# EAGLE board dl010203di02 (EAGLE 7.5.0)
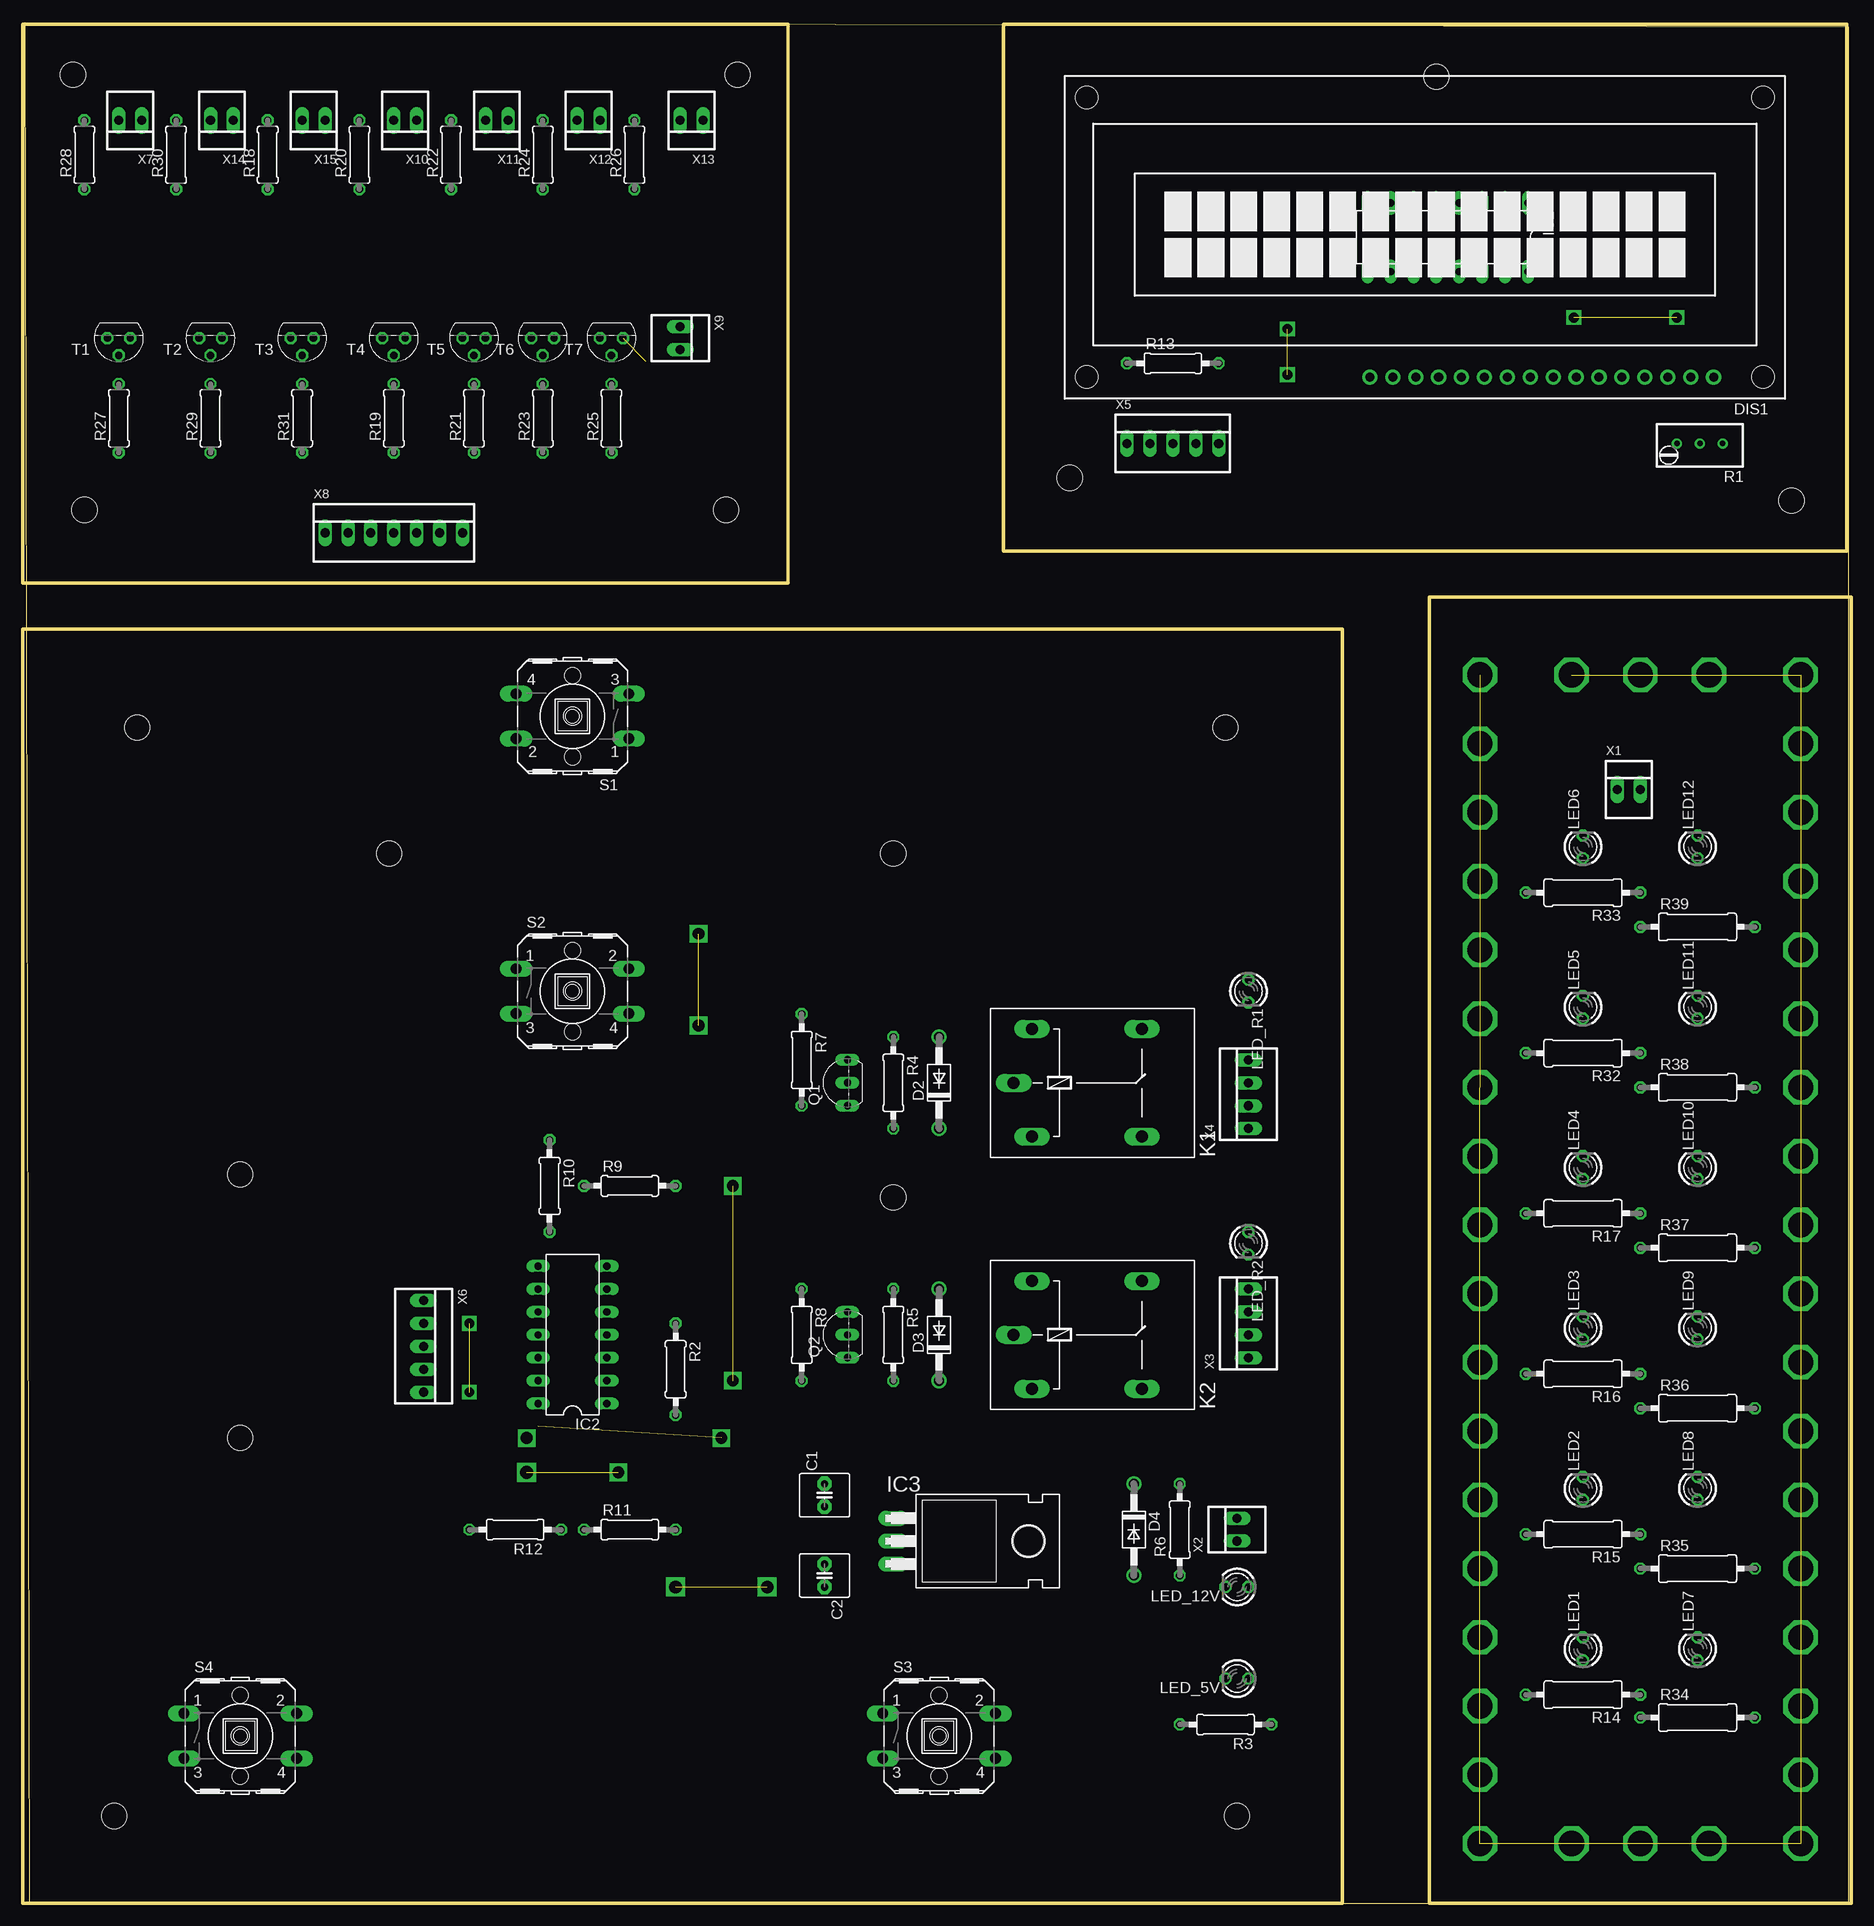
[diagram p0: board, top side]
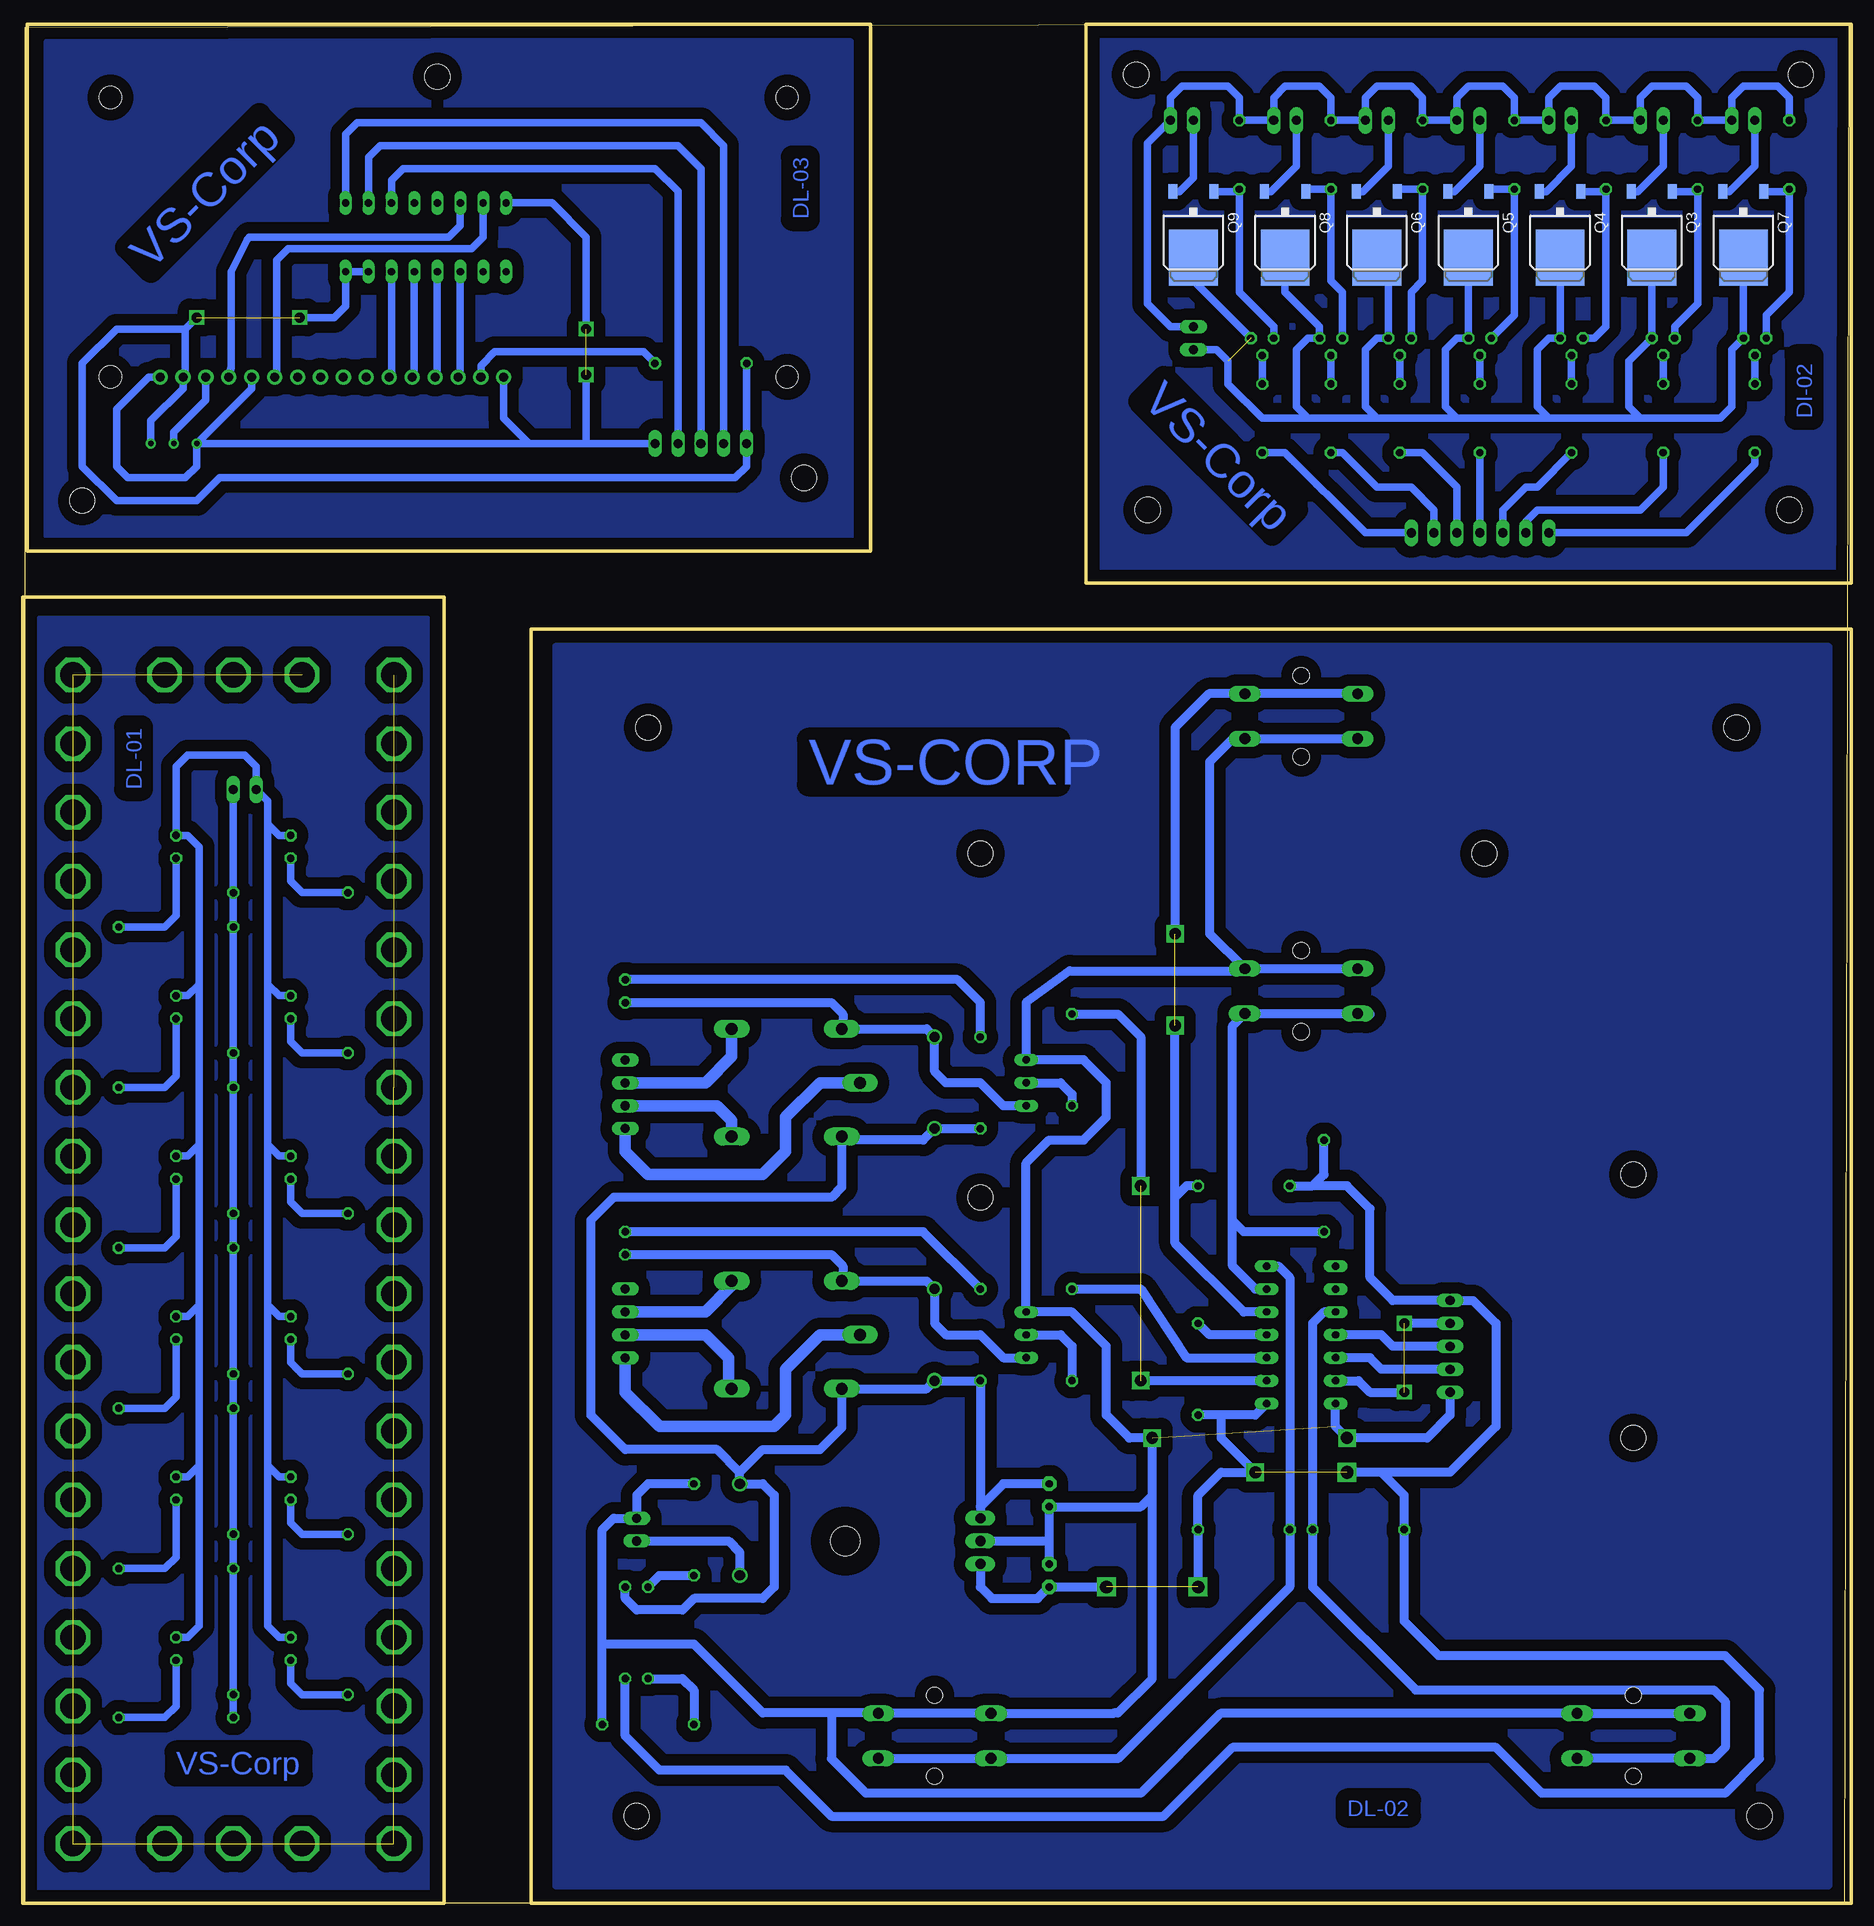
[diagram p1: board, bottom side, seen from below]

Size 202.69 x 208.46 mm. Coordinates in mm from the lower left corner, seen from the top.
Outline: 0.76,0 202.42,0
Outline: 202.42,0 202.42,207.95 0.25,208.46 0.76,0
Outline: 202.42,0 202.69,0 202.69,144.78 155.96,144.78 155.96,0 202.42,0
Outline: 0.76,0 146.3,0 146.3,141.22 0,141.22 0,0 0.76,0
Outline: 84.84,208.28 84.84,146.3 0,146.3 0,208.28 84.84,208.28
Outline: 108.71,208.28 202.18,208.28 202.18,149.86 108.71,149.86 108.71,208.28
Copper layers (1*16): Top 0.035mm / dielectric 1.5mm / Bottom 0.035mm
Design rules "default": minimum track width 10mil, minimum drill 24mil, track to track 8mil, track to pad 8mil, pad to pad 8mil, via to via 8mil, smd to smd 8mil, copper to edge 40mil, drill to drill 8mil, minimum pad ring 10mil, minimum via ring 8mil, stop-mask expansion 4mil, vias tented up to drill 0mil, thermal gap 10mil
Holes 2.8 mm at 10.16,9.65 134.62,9.65 12.7,130.3 133.35,130.3 96.52,116.33 40.64,116.33 24.13,80.77 96.52,78.23 24.13,51.56 6.86,154.43 77.98,154.43 79.25,202.69 5.59,202.69 116.08,157.99 156.72,202.44 196.09,155.45

## Footprints (pad centres in the part's own frame; a part is rotated, then mirrored left to right if it is on the bottom)
C2.5-6 = drill 0.813 pad 1.6 octagon: 1 -1.27,0; 2 1.27,0
DO41-10 = drill 1.118: A 5.08,0; C -5.08,0
TUXGR_16X2_R2 = drill 1 pad 1.676: 1 -32,15.5; 2 -29.46,15.5; 3 -26.92,15.5; 4 -24.38,15.5; 5 -21.84,15.5; 6 -19.3,15.5; 7 -16.76,15.5; 8 -14.22,15.5; 9 -11.68,15.5; 10 -9.14,15.5; 11 -6.6,15.5; 12 -4.06,15.5; 13 -1.52,15.5; 14 1.02,15.5; 15 3.56,15.5; 16 6.1,15.5 | hole 2.5: -37.5,-15.5; 37.5,-15.5; -37.5,15.5; 37.5,15.5
DIL16 = drill 0.813 long: 1 -8.89,-3.81; 2 -6.35,-3.81; 3 -3.81,-3.81; 4 -1.27,-3.81; 5 1.27,-3.81; 6 3.81,-3.81; 7 6.35,-3.81; 8 8.89,-3.81; 9 8.89,3.81; 10 6.35,3.81; 11 3.81,3.81; 12 1.27,3.81; 13 -1.27,3.81; 14 -3.81,3.81; 15 -6.35,3.81; 16 -8.89,3.81
DIL14 = drill 0.813 long: 1 -7.62,-3.81; 2 -5.08,-3.81; 3 -2.54,-3.81; 4 0,-3.81; 5 2.54,-3.81; 6 5.08,-3.81; 7 7.62,-3.81; 8 7.62,3.81; 9 5.08,3.81; 10 2.54,3.81; 11 0,3.81; 12 -2.54,3.81; 13 -5.08,3.81; 14 -7.62,3.81
TO220H = drill 1.118 long: 1 -2.54,-10.16; 2 0,-10.16; 3 2.54,-10.16 | hole 3.302: 0,4.826
G5LE = drill 1.321 long: 1 -7.493,-5.969; 2 -7.493,5.969; O 4.699,5.969; P -9.525,0; S 4.699,-5.969
LED3MM = drill 0.813 octagon: A -1.27,0; K 1.27,0
TO92-EBC = drill 0.813 long: B 0,-1.27; C -2.54,-1.27; E 2.54,-1.27
D-PAK_TO252AA = smd 1 x 1.6: 1 -2.28,-4.8; 3 2.28,-4.8 | smd 5.4 x 6.2: 4 0,2.5
RTRIMT93YA = drill 0.61: 1 0,-2.54; 2 0,0; 3 0,2.54
0207/10 = drill 0.813 octagon: 1 -5.08,0; 2 5.08,0
0309/12 = drill 0.813 octagon: 1 -6.35,0; 2 6.35,0
0207/7 = drill 0.813 octagon: 1 -3.81,0; 2 3.81,0
B3F-40XX = drill 1.194 long: 1 -6.248,2.489; 2 6.248,2.489; 3 -6.248,-2.489; 4 6.248,-2.489 | hole 1.803: 0,-4.496; 0,4.496
TO92 = drill 0.813 octagon: 1 1.27,0; 2 0,1.905; 3 -1.27,0
22-23-2021 = drill 1 long: 1 -1.27,0; 2 1.27,0
22-23-2041 = drill 1 long: 1 -3.81,0; 2 -1.27,0; 3 1.27,0; 4 3.81,0
22-23-2051 = drill 1 long: 1 -5.08,0; 2 -2.54,0; 3 0,0; 4 2.54,0; 5 5.08,0
22-23-2071 = drill 1 long: 1 -7.62,0; 2 -5.08,0; 3 -2.54,0; 4 0,0; 5 2.54,0; 6 5.08,0; 7 7.62,0

## Placement (x,y rotation side)
C1  [C2.5-6]  88.9,45.21 90 top
C2  [C2.5-6]  88.9,36.32 270 top
D2  1N4004  [DO41-10]  101.6,90.93 90 top
D3  1N4004  [DO41-10]  101.6,62.99 90 top
D4  1N4004  [DO41-10]  123.19,41.4 270 top
DIS1  TUXGR_16X2_R2  [TUXGR_16X2_R2]  155.45,184.66 180 top
IC1  4094N  [DIL16]  157.99,184.66 180 top
IC2  PIC16F676P  [DIL14]  60.96,62.99 90 top
IC3  7805T  [TO220H]  106.68,40.13 270 top
K1  G5L  [G5LE]  119.38,90.93 0 top
K2  G5L  [G5LE]  119.38,62.99 0 top
LED1  [LED3MM]  172.97,28.19 90 top
LED2  [LED3MM]  172.97,45.97 90 top
LED3  [LED3MM]  172.97,63.75 90 top
LED4  [LED3MM]  172.97,81.53 90 top
LED5  [LED3MM]  172.97,99.31 90 top
LED6  [LED3MM]  172.97,117.09 90 top
LED7  [LED3MM]  185.67,28.19 90 top
LED8  [LED3MM]  185.67,45.97 90 top
LED9  [LED3MM]  185.67,63.75 90 top
LED10  [LED3MM]  185.67,81.53 90 top
LED11  [LED3MM]  185.67,99.31 90 top
LED12  [LED3MM]  185.67,117.09 90 top
LED_5V  [LED3MM]  134.62,24.89 180 top
LED_12V  [LED3MM]  134.62,35.05 180 top
LED_R1  [LED3MM]  135.89,101.09 270 top
LED_R2  [LED3MM]  135.89,73.15 270 top
Q1  BC548  [TO92-EBC]  90.17,90.93 90 top
Q2  BC548  [TO92-EBC]  90.17,62.99 90 top
Q3  IRFR5305  [D-PAK_TO252AA]  22.1,184.91 180 bottom
Q4  IRFR5305  [D-PAK_TO252AA]  32.26,184.91 180 bottom
Q5  IRFR5305  [D-PAK_TO252AA]  42.42,184.91 180 bottom
Q6  IRFR5305  [D-PAK_TO252AA]  52.58,184.91 180 bottom
Q7  IRFR5305  [D-PAK_TO252AA]  11.94,184.91 180 bottom
Q8  IRFR5305  [D-PAK_TO252AA]  62.74,184.91 180 bottom
Q9  IRFR5305  [D-PAK_TO252AA]  72.9,184.91 180 bottom
R1  [RTRIMT93YA]  185.93,161.8 90 top
R2  [0207/10]  72.39,59.18 270 top
R3  [0207/10]  133.35,19.81 180 top
R4  [0207/10]  96.52,90.93 270 top
R5  [0207/10]  96.52,62.99 270 top
R6  [0207/10]  128.27,41.4 90 top
R7  [0207/10]  86.36,93.47 270 top
R8  [0207/10]  86.36,62.99 270 top
R9  [0207/10]  67.31,79.5 0 top
R10  [0207/10]  58.42,79.5 270 top
R11  [0207/10]  67.31,41.4 0 top
R12  [0207/10]  54.61,41.4 180 top
R13  [0207/10]  127.51,170.69 0 top
R14  [0309/12]  172.97,23.11 180 top
R15  [0309/12]  172.97,40.89 180 top
R16  [0309/12]  172.97,58.67 180 top
R17  [0309/12]  172.97,76.45 180 top
R18  10k  [0207/7]  27.18,193.8 90 top
R19  1k  [0207/7]  41.15,164.59 90 top
R20  10k  [0207/7]  37.34,193.8 90 top
R21  1k  [0207/7]  50.04,164.59 90 top
R22  10k  [0207/7]  47.5,193.8 90 top
R23  1k  [0207/7]  57.66,164.59 90 top
R24  10k  [0207/7]  57.66,193.8 90 top
R25  1k  [0207/7]  65.28,164.59 90 top
R26  10k  [0207/7]  67.82,193.8 90 top
R27  1k  [0207/7]  10.67,164.59 90 top
R28  10k  [0207/7]  6.86,193.8 90 top
R29  1k  [0207/7]  20.83,164.59 90 top
R30  10k  [0207/7]  17.02,193.8 90 top
R31  1k  [0207/7]  30.99,164.59 90 top
R32  [0309/12]  172.97,94.23 180 top
R33  [0309/12]  172.97,112.01 180 top
R34  [0309/12]  185.67,20.57 0 top
R35  [0309/12]  185.67,37.08 0 top
R36  [0309/12]  185.67,54.86 0 top
R37  [0309/12]  185.67,72.64 0 top
R38  [0309/12]  185.67,90.42 0 top
R39  [0309/12]  185.67,108.2 0 top
S1  [B3F-40XX]  60.96,131.57 180 top
S2  [B3F-40XX]  60.96,101.09 0 top
S3  [B3F-40XX]  101.6,18.54 0 top
S4  [B3F-40XX]  24.13,18.54 0 top
T1  2N3904  [TO92]  10.67,173.48 180 top
T2  2N3904  [TO92]  20.83,173.48 180 top
T3  2N3904  [TO92]  30.99,173.48 180 top
T4  2N3904  [TO92]  41.15,173.48 180 top
T5  2N3904  [TO92]  50.04,173.48 180 top
T6  2N3904  [TO92]  57.66,173.48 180 top
T7  2N3904  [TO92]  65.28,173.48 180 top
X1  22-23-2021  [22-23-2021]  178.05,123.44 0 top
X2  22-23-2021  [22-23-2021]  134.62,41.4 90 top
X3  22-23-2041  [22-23-2041]  135.89,64.26 90 top
X4  22-23-2041  [22-23-2041]  135.89,89.66 90 top
X5  22-23-2051  [22-23-2051]  127.51,161.8 0 top
X6  22-23-2051  [22-23-2051]  44.45,61.72 270 top
X7  22-23-2021  [22-23-2021]  11.94,197.61 180 top
X8  7 pin connector  [22-23-2071]  41.15,151.89 0 top
X9  22-23-2021  [22-23-2021]  72.9,173.48 270 top
X10  22-23-2021  [22-23-2021]  42.42,197.61 180 top
X11  22-23-2021  [22-23-2021]  52.58,197.61 180 top
X12  22-23-2021  [22-23-2021]  62.74,197.61 180 top
X13  22-23-2021  [22-23-2021]  74.17,197.61 180 top
X14  22-23-2021  [22-23-2021]  22.1,197.61 180 top
X15  22-23-2021  [22-23-2021]  32.26,197.61 180 top

## Library data of the parts
C1 C2 = capacitor-wima
D2-D4 = diode
DIS1 = display-lcd; OC_FARNELL: unknown; OC_NEWARK: unknown
IC1 = 40xx
IC2 = microchip; MF: MICROCHIP; MPN: PIC16F676-I/P; OC_FARNELL: 9760512; OC_NEWARK: 54K2829
IC3 = linear
K1 K2 = relay; OC_FARNELL: unknown; OC_NEWARK: unknown
LED1-LED12 LED_5V LED_12V LED_R1 LED_R2 = led
Q1 Q2 = transistor-npn
Q3-Q9 = transistor-power
R1 R18-R31 = rcl
R2-R17 R32-R39 = resistor
S1-S4 = switch-omron; MF: OMRON COMPONENTS USA; MPN: B3F-4000; OC_FARNELL: 176434; OC_NEWARK: 36K3105
T1-T7 = transistor
X1 X2 X7 X9-X15 = con-molex; MF: MOLEX; MPN: 22-23-2021; OC_FARNELL: 1462926; OC_NEWARK: 25C3832
X3 X4 = con-molex; MF: MOLEX; MPN: 22-23-2041; OC_FARNELL: 1462920; OC_NEWARK: 38C0355
X5 X6 = con-molex; MF: MOLEX; MPN: 22-23-2051; OC_FARNELL: 1462952; OC_NEWARK: 38C9178
X8 = con-molex; MF: MOLEX; MPN: 22-23-2071; OC_FARNELL: 1654534; OC_NEWARK: 56H0445

## Nets
E: DIS1.6 IC1.7
GND: C1.1 C2.1 IC2.14 IC3.2 Q1.E Q2.E R3.1 R6.2 S1.1 S1.2 S2.1 S2.2 S3.1 S3.2 S4.1 S4.2 X2.2 X6.5
GND1: Q3.4 Q4.4 Q5.4 Q6.4 Q7.4 Q8.4 Q9.4 T1.3 T2.3 T3.3 T4.3 T5.3 T6.3 T7.3 X9.2
N$1: DIS1.3 R1.2
N$2: DIS1.11 IC1.14
N$3: DIS1.12 IC1.13
N$4: DIS1.13 IC1.12
N$5: DIS1.14 IC1.11
N$6: IC2.11 X6.3
N$7: IC2.13 X6.2
N$8: IC2.12 X6.4
N$9: IC2.4 R2.1
N$10: Q1.B R7.2
N$11: D2.A K1.2 LED_R1.K Q1.C
N$12: D3.A K2.2 LED_R2.K Q2.C
N$13: Q2.B R8.2
N$15: K2.P X3.1
N$16: K2.S X3.2
N$17: K2.O X3.3
N$18: K1.S X4.2
N$19: K1.P X4.1
N$20: K1.O X4.3
N$21: D4.A X2.1
N$22: LED_5V.K R3.2
N$23: LED_R2.A R5.1
N$25: IC2.6 R10.2 S2.3 S2.4
N$26: LED_R1.A R4.1
N$27: IC2.7 R11.1 S3.3 S3.4
N$28: IC2.10 R12.1 S4.3 S4.4
N$29: R14.1 R15.1 R16.1 R17.1 R32.1 R33.1 R34.1 R35.1 R36.1 R37.1 R38.1 R39.1 X1.2
N$30: LED_12V.K R6.1
N$31: IC1.3 X5.4
N$32: IC1.2 X5.3
N$33: IC1.1 X5.2
N$34: IC2.5 R9.2 S1.3 S1.4
N$35: DIS1.15 R13.2
N$36: LED1.K LED2.K LED3.K LED4.K LED5.K LED6.K LED7.K LED8.K LED9.K LED10.K LED11.K LED12.K X1.1
N$37: C1.2 D2.C D3.C D4.C IC3.1 K1.1 K2.1 LED_12V.A R4.2 R5.2
N$40: LED1.A R14.2
N$41: LED2.A R15.2
N$42: LED3.A R16.2
N$43: LED4.A R17.2
N$44: LED5.A R32.2
N$45: LED6.A R33.2
N$46: LED7.A R34.2
N$47: LED8.A R35.2
N$48: LED9.A R36.2
N$49: LED10.A R37.2
N$50: LED11.A R38.2
N$51: LED12.A R39.2
N$93: Q7.1 R28.1 T1.1
N$94: R27.2 T1.2
N$95: Q7.3 X7.2
N$96: R27.1 X8.1
N$97: Q3.1 R30.1 T2.1
N$98: R29.2 T2.2
N$99: Q3.3 X14.2
N$100: Q4.1 R18.1 T3.1
N$101: R31.2 T3.2
N$102: Q4.3 X15.2
N$103: R31.1 X8.3
N$104: Q5.1 R20.1 T4.1
N$105: R19.2 T4.2
N$106: Q5.3 X10.2
N$107: R19.1 X8.4
N$108: Q6.1 R22.1 T5.1
N$109: R21.2 T5.2
N$110: Q6.3 X11.2
N$111: R21.1 X8.5
N$112: Q8.1 R24.1 T6.1
N$113: R23.2 T6.2
N$114: Q8.3 X12.2
N$115: R23.1 X8.6
N$116: Q9.1 R26.1 T7.1
N$117: R25.2 T7.2
N$118: Q9.3 X13.2
N$119: R25.1 X8.7
N$120: R29.1 X8.2
RELAY1: IC2.2 R7.1
RELAY2: IC2.3 R8.1
RS: DIS1.4 IC1.6
VCC: C2.2 IC2.1 IC3.3 LED_5V.A R2.2 R9.1 R10.1 R11.2 R12.2 X6.1
VDD: DIS1.2 IC1.15 IC1.16 R1.1 R13.1 X5.1
VDD1: R18.2 R20.2 R22.2 R24.2 R26.2 R28.2 R30.2 X7.1 X9.1 X10.1 X11.1 X12.1 X13.1 X14.1 X15.1
VSS: DIS1.1 DIS1.5 DIS1.16 IC1.8 R1.3 X5.5

## Tracks (layer width: path | path; a pad name or v marks a point on that pad's centre or on a via)
E
  Bottom 0.813: IC1.7 151.64,184.66 152.91,183.39 173.23,183.39 174.5,182.12 174.5,169.41 DIS1.6
GND  (via drill 1.3)  (1 unrouted)
  Bottom 1.016: X6.5 44.45,54.1 46.99,51.56 v55.88,51.56 57.15,52.83 IC2.14 | R3.1 138.43,28.7 | 138.43,28.7 138.43,41.4 137.16,42.67 X2.2 134.62,45.21 133.35,46.48 R6.2 | 77.47,45.21 77.47,24.89 81.28,21.08 81.74,21.08 81.79,21.03 S3.1 95.4,21.08 107.9,21.08 | 77.47,45.21 v77.47,51.56 80.01,51.56 82.55,54.1 82.55,61.72 86.36,65.53 Q2.E 91.44,82.04 88.9,84.58 85.09,84.58 82.55,87.12 82.55,90.93 85.09,93.47 Q1.E 91.44,99.82 86.64,103.35 67.44,103.35 S2.2 | S1.2 S1.1 68.53,129.08 71.12,126.49 71.12,107.44 71.07,107.44 S2.2 | S2.2 S2.1 | 107.9,21.08 S3.2 | 113.03,21.08 113.03,16 109.22,12.19 78.74,12.19 69.9,21.03 S4.2 S4.1 | 107.9,21.08 113.03,21.08 | 88.9,40.13 C1.1 78.74,43.94 77.47,45.21 | 88.9,40.13 C2.1 | IC3.2 88.9,40.13 | 113.03,21.08 120.65,21.08 128.27,28.7 138.43,28.7
GND1  (1 unrouted)
  Bottom 0.813: Q7.4 T1.3 13.21,172.21 13.21,165.86 14.48,164.59 23.37,164.59 | Q3.4 T2.3 24.64,170.94 24.64,165.86 23.37,164.59 | Q4.4 T3.3 33.53,173.48 34.8,172.21 34.8,165.86 33.53,164.59 | Q5.4 T4.3 43.69,173.48 44.96,172.21 44.96,165.86 43.69,164.59 | Q6.4 52.62,182.37 53.85,182.37 51.31,179.83 T5.3 52.58,173.48 53.85,172.21 53.85,165.86 52.58,164.59 | Q8.4 62.74,178.56 58.93,174.75 T6.3 60.2,173.48 61.47,172.21 61.47,165.86 60.2,164.59 | T7.3 72.9,179.83 Q9.4 72.9,183.64 | X9.2 70.36,172.21 69.09,170.94 69.09,168.4 65.28,164.59 60.2,164.59 | 60.2,164.59 52.58,164.59 | 52.58,164.59 43.69,164.59 | 43.69,164.59 33.53,164.59 | 33.53,164.59 23.37,164.59
N$1
  Bottom 0.813: DIS1.3 182.37,166.63 185.93,163.07 R1.2
N$2
  Bottom 0.813: IC1.14 161.8,169.41 DIS1.11
N$3
  Bottom 0.813: IC1.13 159.26,169.41 DIS1.12
N$4
  Bottom 0.813: IC1.12 156.72,169.41 DIS1.13
N$5
  Bottom 0.813: IC1.11 154.18,169.41 DIS1.14
N$6
  Bottom 1.016: X6.3 50.8,61.72 52.07,62.99 IC2.11
N$7  (via drill 1.1)  (1 unrouted)
  Bottom 1.016: X6.2 v49.53,64.26 | IC2.13 54.61,57.91 53.34,56.64 v49.53,56.64
N$8
  Bottom 1.016: X6.4 52.07,59.18 53.34,60.45 IC2.12
N$9
  Bottom 1.016: IC2.4 71.12,62.99 R2.1
N$10
  Bottom 1.016: Q1.B 87.63,90.93 86.36,89.66 R7.2
N$11
  Bottom 1.016: Q1.C 93.98,88.39 96.52,90.93 100.33,90.93 101.6,92.2 D2.A 102.49,96.9 K1.2 111.76,97.03 111.76,98.55 113.03,99.82 LED_R1.K
N$12
  Bottom 1.016: Q2.C 93.98,60.45 96.52,62.99 100.33,62.99 101.6,64.26 D3.A 102.49,68.96 K2.2 111.76,69.09 111.76,70.61 113.03,71.88 LED_R2.K
N$13
  Bottom 1.016: Q2.B 87.63,62.99 86.36,61.72 R8.2
N$14
  pour Bottom (isolate 1.27): 111,206.25 199.9,206.25 199.9,151.64 111,151.64
N$15
  Bottom 1.27: K2.P 114.3,62.99 118.11,59.18 118.11,54.1 119.38,52.83 132.08,52.83 135.89,56.64 X3.1
N$16
  Bottom 1.27: X3.2 127,62.99 124.46,60.45 124.46,57.4 K2.S
N$17
  Bottom 1.27: K2.O 124.08,68.45 127,65.53 X3.3
N$18
  Bottom 1.27: K1.S 124.08,86.74 125.73,88.39 X4.2
N$19
  Bottom 1.27: K1.P 114.3,90.93 118.11,87.12 118.11,83.31 120.65,80.77 133.35,80.77 135.89,83.31 X4.1
N$20
  Bottom 1.27: X4.3 127,90.93 124.08,93.85 K1.O
N$21
  Bottom 1.016: X2.1 124.46,40.13 123.19,38.86 D4.A
N$22
  Bottom 1.016: LED_5V.K 129.54,24.89 128.27,23.62 R3.2
N$23
  Bottom 1.016: R5.1 102.87,74.42 LED_R2.A
N$24
  pour Bottom (isolate 1.27): 2.54,139.19 143.51,139.19 143.51,2.03 2.54,2.03
N$25
  Bottom 1.016: IC2.6 66.04,68.07 68.58,70.61 68.58,75.69 | 68.58,75.69 68.58,97.23 S2.4 S2.3 54.66,98.55 53.34,98.55 | R10.2 67.31,74.42 68.58,75.69
N$26
  Bottom 1.016: R4.1 96.52,99.82 99.06,102.36 LED_R1.A
N$27
  Bottom 1.016: IC2.7 63.5,70.61 62.23,69.34 R11.1 62.23,35.05 81.28,16 95.3,16 S3.3 S3.4
N$28
  Bottom 1.016: IC2.10 58.42,65.53 59.69,64.26 R12.1 59.69,35.05 48.26,23.62 15.24,23.62 13.97,22.35 13.97,17.27 15.24,16 17.83,16 S4.3 | S4.3 17.83,16.05 | S4.3 S4.4
N$29
  Bottom 0.813: X1.2 R33.1 R39.1 R32.1 R38.1 R17.1 R37.1 R16.1 R36.1 R15.1 R35.1 R14.1 R34.1
N$30
  Bottom 1.016: LED_12V.K 132.08,36.32 R6.1
N$31
  Bottom 0.813: IC1.3 161.8,191.01 160.53,192.28 132.59,192.28 130.05,189.74 X5.4
N$32
  Bottom 0.813: IC1.2 164.34,193.55 163.07,194.82 130.05,194.82 127.51,192.28 X5.3
N$33
  Bottom 0.813: IC1.1 166.88,196.09 165.61,197.36 127.51,197.36 124.97,194.82 X5.2
N$34  (via drill 1.1, 1.3)  (1 unrouted)
  Bottom 0.813: 54.66,134.11 S1.4
  Bottom 1.016: IC2.5 67.31,65.53 74.93,73.15 74.93,78.23 | 74.93,78.23 v74.93,97.28 | v74.93,107.44 74.93,130.3 71.17,134.06 S1.3 S1.4 | R9.2 73.66,79.5 74.93,78.23
N$35
  Bottom 0.813: DIS1.15 151.89,170.44 150.37,171.96 133.86,171.96 R13.2
N$36
  Bottom 0.813: 183.13,101.85 183.13,117.09 184.4,118.36 LED12.K 185.67,125.98 184.4,127.25 178.05,127.25 176.78,125.98 X1.1 175.51,122.17 175.51,119.63 | 183.13,101.85 184.4,100.58 LED11.K | LED10.K 184.4,82.8 183.13,84.07 | 183.13,84.07 183.13,101.85 | LED9.K 184.4,65.02 183.13,66.29 | 183.13,66.29 183.13,84.07 | LED8.K 184.4,47.24 183.13,48.51 | 183.13,48.51 183.13,66.29 | LED7.K 184.4,29.46 183.13,30.73 183.13,48.51 | LED1.K 174.24,29.46 175.51,30.73 175.51,48.51 | 175.51,48.51 175.51,66.29 | 175.51,66.29 175.51,84.07 | 175.51,84.07 175.51,101.85 | 175.51,101.85 175.51,119.63 | LED6.K 174.24,118.36 175.51,119.63 | LED5.K 174.24,100.58 175.51,101.85 | LED4.K 174.24,82.8 175.51,84.07 | LED3.K 174.24,65.02 175.51,66.29 | LED2.K 174.24,47.24 175.51,48.51
N$37
  Bottom 1.016: R4.2 D2.C 102.87,84.58 111.51,84.58 K1.1 111.89,79.38 113.03,78.23 137.16,78.23 139.7,75.69 139.7,54.1 135.89,50.29 125.73,50.29 123.19,47.75 | 123.19,47.75 D4.C 120.65,46.48 119.38,45.21 119.38,35.05 120.65,33.78 128.27,33.78 129.54,32.51 134.62,32.51 135.89,33.78 LED_12V.A | 123.19,47.75 120.65,50.29 114.3,50.29 111.89,52.7 K2.1 102.49,57.02 D3.C R5.2 96.52,43.94 | 96.52,43.94 IC3.1 | C1.2 93.98,46.48 96.52,43.94
N$38  (via drill 2.8 pad 1.27)  (41 unrouted)
  other vias: 161.54,14.22 161.54,21.84 161.54,29.46 161.54,37.08 161.54,44.7 161.54,52.32 161.54,59.94 161.54,67.56 161.54,75.18 161.54,82.8 161.54,90.42 161.54,98.04 161.54,105.66 161.54,113.28 161.54,120.9 161.54,128.52 161.54,136.14 171.7,136.14 179.32,136.14 186.94,136.14 197.1,136.14 197.1,128.52 197.1,120.9 197.1,113.28 161.54,6.6 197.1,105.66 197.1,98.04 197.1,90.42 197.1,82.8 197.1,75.18 197.1,67.56 197.1,59.94 197.1,52.32 197.1,44.7 197.1,37.08 197.1,29.46 197.1,21.84 197.1,14.22 197.1,6.6 186.94,6.6 179.32,6.6 171.7,6.6
N$39
  pour Bottom (isolate 1.27): 157.73,1.52 157.73,142.49 200.91,142.49 200.91,1.52
N$40
  Bottom 0.813: R14.2 171.7,23.11 172.97,24.38 LED1.A
N$41
  Bottom 0.813: R15.2 171.7,40.89 172.97,42.16 LED2.A
N$42
  Bottom 0.813: R16.2 171.7,58.67 172.97,59.94 LED3.A
N$43
  Bottom 0.813: R17.2 171.7,76.45 172.97,77.72 LED4.A
N$44
  Bottom 0.813: R32.2 171.7,94.23 172.97,95.5 LED5.A
N$45
  Bottom 0.813: R33.2 171.7,112.01 172.97,113.28 LED6.A
N$46
  Bottom 0.813: R34.2 186.94,20.57 185.67,21.84 LED7.A
N$47
  Bottom 0.813: R35.2 186.94,37.08 185.67,38.35 LED8.A
N$48
  Bottom 0.813: R36.2 186.94,54.86 185.67,56.13 LED9.A
N$49
  Bottom 0.813: R37.2 186.94,72.64 185.67,73.91 LED10.A
N$50
  Bottom 0.813: R38.2 186.94,90.42 185.67,91.69 LED11.A
N$51
  Bottom 0.813: R39.2 186.94,108.2 185.67,109.47 LED12.A
N$93
  Bottom 0.813: Q7.1 7.14,189.71 R28.1 6.86,178.56 9.4,176.02 T1.1
N$94
  Bottom 0.813: T1.2 R27.2
N$95
  Bottom 0.813: Q7.3 13.49,189.71 10.67,192.53 X7.2
N$96
  Bottom 0.813: R27.1 10.67,159.51 18.29,151.89 X8.1
N$97
  Bottom 0.813: Q3.1 17.3,189.71 R30.1 17.02,177.29 19.56,174.75 T2.1
N$98
  Bottom 0.813: T2.2 R29.2
N$99
  Bottom 0.813: Q3.3 23.65,189.71 20.83,192.53 X14.2
N$100
  Bottom 0.813: Q4.1 27.46,189.71 R18.1 27.18,174.75 28.45,173.48 T3.1
N$101
  Bottom 0.813: T3.2 R31.2
N$102
  Bottom 0.813: Q4.3 33.81,189.71 30.99,192.53 X15.2
N$103
  Bottom 0.813: R31.1 34.8,156.97 36.07,156.97 38.61,154.43 X8.3
N$104
  Bottom 0.813: Q5.1 39.86,189.99 R20.1 37.34,176.02 T4.1
N$105
  Bottom 0.813: T4.2 R19.2
N$106
  Bottom 0.813: Q5.3 43.97,189.71 41.15,192.53 X10.2
N$107
  Bottom 0.813: R19.1 X8.4
N$108
  Bottom 0.813: Q6.1 50.02,189.99 R22.1 47.5,179.83 48.77,178.56 T5.1
N$109
  Bottom 0.813: T5.2 R21.2
N$110
  Bottom 0.813: Q6.3 54.13,189.71 51.31,192.53 X11.2
N$111
  Bottom 0.813: R21.1 47.5,160.78 43.69,156.97 X8.5
N$112
  Bottom 0.813: Q8.1 60.18,189.99 R24.1 57.66,179.83 56.39,178.56 T6.1
N$113
  Bottom 0.813: T6.2 R23.2
N$114
  Bottom 0.813: Q8.3 64.29,189.71 61.47,192.53 X12.2
N$115
  Bottom 0.813: R23.1 56.39,160.78 52.58,156.97 48.77,156.97 46.23,154.43 X8.6
N$116
  Bottom 0.813: Q9.1 68.1,189.71 R26.1 67.82,178.56 64.01,174.75 T7.1
N$117
  Bottom 0.813: T7.2 R25.2
N$118
  Bottom 0.813: Q9.3 74.45,189.71 72.9,191.26 X13.2
N$119
  Bottom 0.813: X8.7 53.85,151.89 62.74,160.78 R25.1
N$120
  Bottom 0.813: R29.1 20.83,156.97 23.37,154.43 34.8,154.43 36.07,153.16 X8.2
N$121
  pour Bottom (isolate 1.27): 1.78,206.5 83.06,206.5 83.06,148.08 1.78,148.08
RELAY1  (via drill 1.3)  (1 unrouted)
  Bottom 1.016: R7.1 81.28,98.55 78.74,96.01 v78.74,79.5 | IC2.2 v78.74,57.91
RELAY2
  Bottom 1.016: R8.1 78.74,68.07 73.66,60.45 IC2.3
RS
  Bottom 0.813: IC1.6 154.18,185.93 155.45,184.66 177.55,184.66 177.8,184.4 179.58,180.85 179.58,170.18 DIS1.4
VCC  (via drill 1.3, 1.4, 1.4 pad 1.27)  (2 unrouted)
  Bottom 1.016: 52.07,47.75 44.45,47.75 39.37,52.83 39.37,64.26 41.91,66.8 X6.1 50.8,66.8 53.34,69.34 53.34,76.96 55.88,79.5 59.69,79.5 | 52.07,47.75 v55.88,47.75 | IC2.1 66.04,54.1 69.85,54.1 | 69.85,54.1 R2.2 | 69.85,54.1 69.85,51.56 v66.04,47.75 69.85,47.75 72.39,45.21 R11.2 v72.39,35.05 | 52.07,47.75 49.53,45.21 R12.2 49.53,31.24 45.72,27.43 13.97,27.43 10.16,23.62 10.16,16 13.97,12.19 34.29,12.19 39.37,17.27 68.58,17.27 76.2,9.65 113.03,9.65 118.11,14.73 132.08,14.73 135.89,18.54 LED_5V.A | R9.1 59.69,79.5 | 59.69,79.5 58.42,80.77 R10.1 | IC3.3 96.52,35.05 95.25,33.78 90.17,33.78 C2.2 v82.55,35.05
VDD  (via drill 1.1)  (1 unrouted)
  Bottom 0.813: IC1.15 IC1.16 166.88,177.04 168.15,175.77 v171.96,175.77 | R1.1 188.47,164.34 184.91,167.9 DIS1.2 184.66,169.41 184.66,174.5 | 184.66,174.5 v183.39,175.77 | 184.66,174.5 192.28,174.5 196.09,170.69 196.09,159.26 192.28,155.45 183.39,155.45 180.85,157.99 123.7,157.99 122.43,159.26 X5.1 R13.1
VDD1
  Bottom 0.813: R28.2 6.86,200.15 8.13,201.42 11.94,201.42 13.21,200.15 X7.1 R30.2 17.02,200.15 18.29,201.42 22.1,201.42 23.37,200.15 X14.1 R18.2 27.18,200.15 28.45,201.42 32.26,201.42 33.53,200.15 X15.1 R20.2 37.34,200.15 38.61,201.42 42.42,201.42 43.69,200.15 X10.1 R22.2 47.5,200.15 48.77,201.42 52.58,201.42 53.85,200.15 X11.1 R24.2 57.66,200.15 58.93,201.42 62.74,201.42 64.01,200.15 X12.1 R26.2 67.82,200.15 69.09,201.42 74.17,201.42 75.44,200.15 X13.1 77.98,195.07 77.98,177.29 75.44,174.75 X9.1
VSS  (via drill 1.1)  (1 unrouted)
  Bottom 0.813: IC1.8 144.02,188.47 140.21,184.66 v140.21,174.5 | DIS1.1 188.73,169.16 192.28,165.61 192.28,159.26 191.01,157.99 184.66,157.99 183.39,159.26 R1.3 | DIS1.5 177.29,167.9 R1.3 | X5.5 140.21,161.8 | 140.21,161.8 146.56,161.8 | 146.56,161.8 R1.3 | DIS1.16 149.35,164.59 146.56,161.8 | 140.21,161.8 v140.21,169.42

## Text on the board
Bottom: DL-03 | VS-Corp | DI-02 | VS-Corp | VS-CORP | DL-01 | VS-Corp | DL-02